# EAGLE board 04C-003 (EAGLE 6.3)
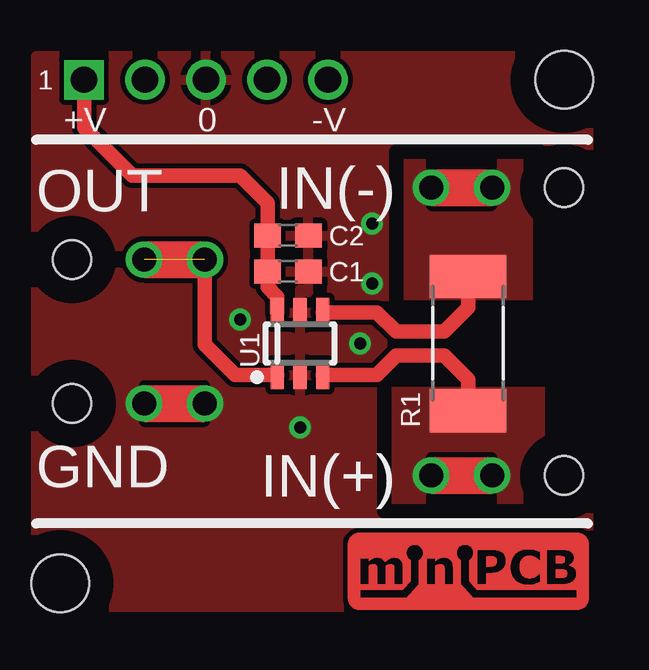
[diagram p0: board, top side]
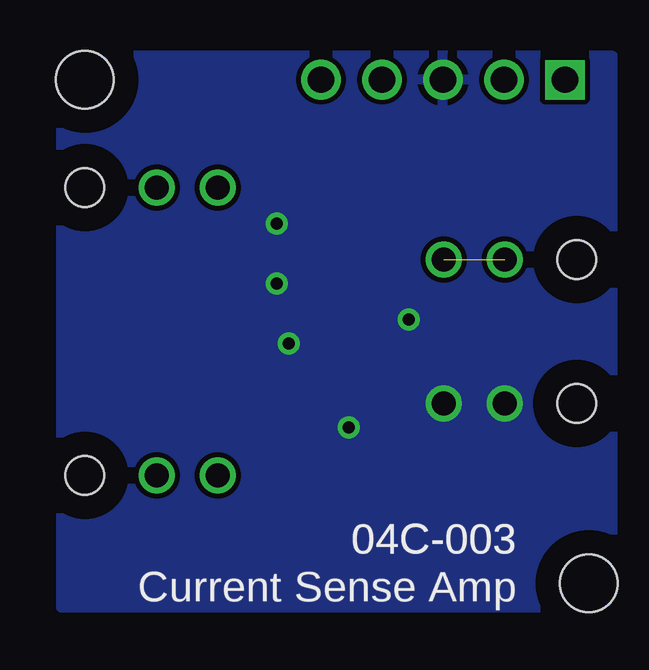
[diagram p1: board, bottom side, seen from below]

No outline drawn. Coordinates in mm, seen from the top.
Copper layers (1*16): Top 0.035mm / dielectric 1.5mm / Bottom 0.035mm
Design rules "default": minimum track width 10mil, minimum drill 24mil, track to track 8mil, track to pad 8mil, pad to pad 8mil, via to via 8mil, smd to smd 8mil, copper to edge 40mil, drill to drill 8mil, minimum pad ring 10mil, minimum via ring 8mil, stop-mask expansion 4mil, vias tented up to drill 0mil, thermal gap 10mil
Holes 1.6 mm at 2.5,15.5 2.5,9.5 23,18.5 23,6.5
tRestrict: 8 lines

## Footprints (pad centres in the part's own frame; a part is rotated, then mirrored left to right if it is on the bottom)
MINIPCB_25X25MM = drill 1.1 square: 1 3,23 | drill 1.1: 2 5.54,23; 3 8.08,23; 4 10.62,23; 5 13.16,23 | hole 2.4: 23,23; 2,2
C0603 = smd 1.1 x 1: 1 -0.85,0; 2 0.85,0
PINS_1_1MM_K = drill 1: 1 0,0; 2 2.54,0
R2512K = smd 1.8 x 3.2: 1 -2.8,0; 2 2.8,0
SOT23-6 = smd 0.55 x 1.2: 1 -0.95,-1.3; 2 0,-1.3; 3 0.95,-1.3; 4 0.95,1.3; 5 0,1.3; 6 -0.95,1.3

## Placement (x,y rotation side)
04C-003  Current Sense Amp  [MINIPCB_25X25MM]  0,0 0 top
C1  4n7  [C0603]  11.5,15 0 top
C2  4u7  [C0603]  11.5,16.5 0 top
P1  IN+  [PINS_1_1MM_K]  20,6.5 180 top
P2  IN-  [PINS_1_1MM_K]  20,18.5 180 top
P3  GND  [PINS_1_1MM_K]  5.5,9.5 0 top
P4  OUT  [PINS_1_1MM_K]  5.5,15.5 0 top
R1  [R2512K]  19,12 90 top
U1  INAX81  [SOT23-6]  12,12 0 top

## Library data of the parts
04C-003 C1 C2 U1 = nolan-utsa
P1-P4 R1 = nolan

## Nets
GND: 04C-003.3 C1.2 C2.2 P3.1 P3.2 U1.2 U1.5
IN+: P1.1 P1.2 R1.1 U1.3
IN-: P2.1 P2.2 R1.2 U1.4
N$3: P4.1 P4.2 U1.1
N$4: 04C-003.1 C1.1 C2.1 U1.6

## Tracks (layer width: path | path; a pad name or v marks a point on that pad's centre or on a via)
GND  (via drill 0.5)
  other vias: 9.5,13 15,17 15,14.5 14.5,12 12,8.5
  pour Top: 1,24 24,24 24,1 1,1
  pour Bottom: 1,24 24,24 24,1 1,1
IN+
  Top 0.61: R1.1 19,10.5 18,11.5 16,11.5 15.2,10.7 U1.3
  pour Top: 15.5,10.5 22.5,10.5 22.5,5 15.5,5
IN-
  Top 0.61: R1.2 19,13.5 18,12.5 16,12.5 15.2,13.3 U1.4
  pour Top: 16,20 22,20 22,13.5 16,13.5
N$3  (1 unrouted)
  Top 0.61: U1.1 9.3,10.7 8.04,11.96 P4.2
N$4
  Top 0.61: 04C-003.1 3,21 5,19 9.5,19 10.65,17.85 C2.1 C1.1 10.65,14.35 11.05,13.95 U1.6

## Text on the board
tPlace: OUT | IN(-) | GND | IN(+)
_tNames: C2 | C1 | U1 | R1
_bNames: 04C-003